# Altium PCB Main Board.PcbDoc
Units mm, origin at the board's own origin, x right, y up, seen from the top; angles counter-clockwise.
Board outline 173 x 13.45 mm, 4 copper layers (Top, Signal Layer 1, Signal Layer 2, Bottom), stack 0.689 mm thick; 121 components, 68 nets, 357 pads, 131 vias.
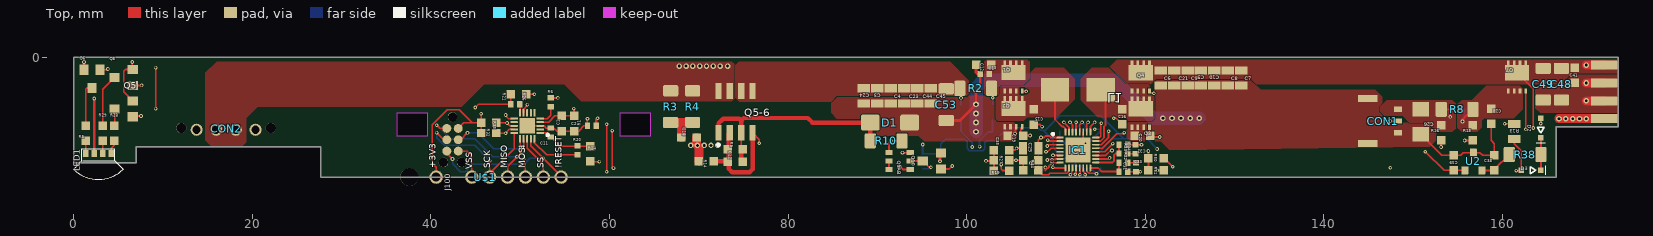
[diagram p0: Top view]
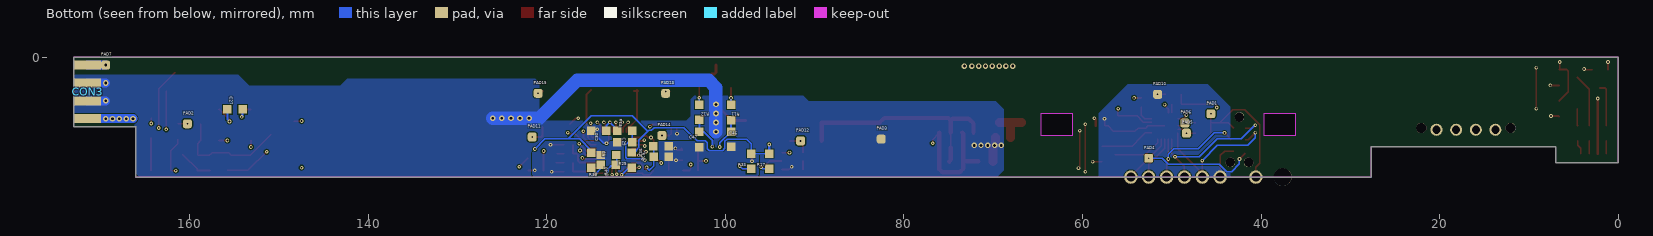
[diagram p1: Bottom view, seen from below]
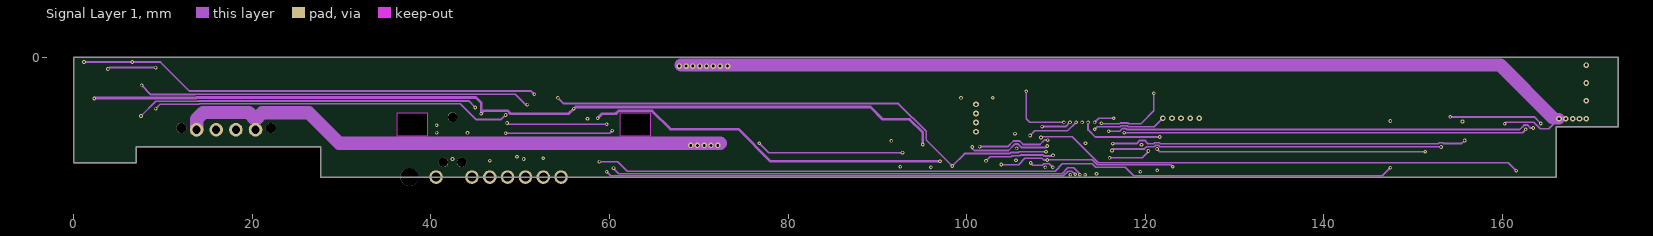
[diagram p2: Signal Layer 1]
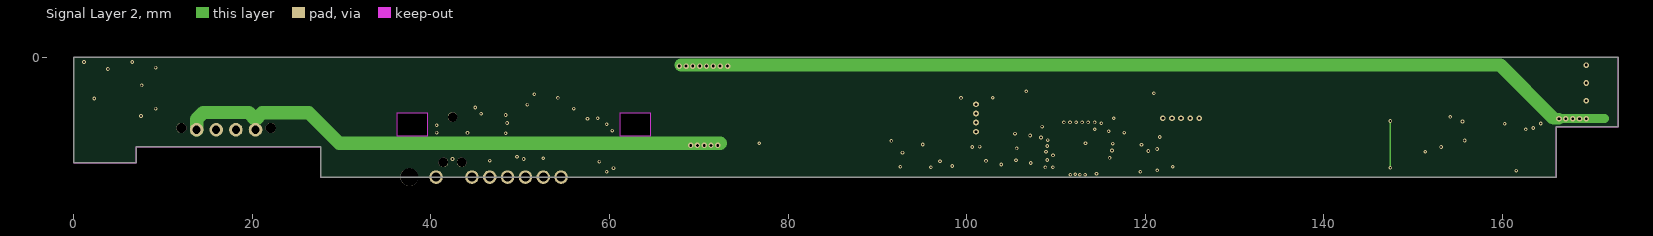
[diagram p3: Signal Layer 2]

## Layer stack, top to bottom
Top Solder: solder mask 0.0102, Solder Resist, Dk 3.5
Top: signal copper 0.018
Dielectric 1: core 0.2, FR-4, Dk 4.8
Signal Layer 1: signal copper 0.036
Dielectric 3: prepreg 0.127, Dk 4.2
Signal Layer 2: signal copper 0.036
Dielectric 2: core 0.254, Dk 4.2
Bottom: signal copper 0.018
Bottom Solder: solder mask 0.0102, Solder Resist, Dk 3.5

## Board outline
0,-11.85 0,0 173,0 173,-7.8 166.05,-7.8 166.05,-13.45 27.685,-13.45 27.685,-10.05 7,-10.05 7,-11.85
cut-out: 61.15,-6.298 61.15,-8.798 64.65,-8.798 64.65,-6.298
cut-out: 36.15,-6.298 36.15,-8.798 39.65,-8.798 39.65,-6.298

## Design rules (kind name [scope] priority, off if disabled: settings)
Clearance Clearance_1 [OnLayer('Keep-Out Layer')] p1: gap=0.15 ignorepadtopadclearanceinfootprint=FALSE except(0: Arc-Hole Track-Hole SMDPad-Hole THPad-Hole Via-Hole Fill-Hole Poly-Hole Region-Hole Text-Hole; 0.05: Track-Track Track-SMDPad Track-THPad Track-Via Track-Fill Track-Poly Track-Region Track-Text SMDPad-SMDPad SMDPad-THPad SMDPad-Via SMDPad-Fill SMDPad-Poly SMDPad-Region SMDPad-Text Via-Via Via-Fill Via-Poly Via-Region Via-Text)
Clearance [All] p2: gap=0.127 ignorepadtopadclearanceinfootprint=FALSE except(0: Arc-Hole Track-Hole SMDPad-Hole THPad-Hole Via-Hole Fill-Hole Poly-Hole Region-Hole Text-Hole)
ComponentClearance [All] p1 off: gap=0.254 collisioncheckmode=3 verticalgap=0.254 showdistances=FALSE
HoleSize [All] p1: absolutevalues=TRUE maxlimit=2540 minlimit=0.2 maxpercent=80.000 minpercent=20.000
HoleToHoleClearance mdDrill [All] p1: gap=0.35 allowstackedmicrovias=TRUE
PasteMaskExpansion Expansion_SMDPaste_OFF [InPadClass('SMDPaste_OFF')] p1: expansion=0
PasteMaskExpansion mlMinCreamFrame [All] p2: expansion=0
PolygonConnect PolygonConnect_For_PolygonThermal_ON_Width78700_Gap78740 [InPolygonClass('PolygonThermal_ON_Width78700_Gap78740')] p1: connectstyle=Direct reliefconductorwidth=0.2 reliefentries=4 polygonreliefangle="90 Angle" airgapwidth=0.2
PolygonConnect PolygonConnect_For_PolygonThermal_ON_Width137800_Gap78740 [InPolygonClass('PolygonThermal_ON_Width137800_Gap78740')] p2: connectstyle=Direct reliefconductorwidth=0.35 reliefentries=4 polygonreliefangle="90 Angle" airgapwidth=0.2
PolygonConnect PolygonConnect_For_PolygonThermal_ON_Width60000_Gap78740 [InPolygonClass('PolygonThermal_ON_Width60000_Gap78740')] p3: connectstyle=Direct reliefconductorwidth=0.152 reliefentries=4 polygonreliefangle="90 Angle" airgapwidth=0.2
PolygonConnect PolygonConnect_For_PolygonThermal_ON_Width196900_Gap78740 [InPolygonClass('PolygonThermal_ON_Width196900_Gap78740')] p4: connectstyle=Direct reliefconductorwidth=0.5 reliefentries=4 polygonreliefangle="90 Angle" airgapwidth=0.2
PolygonConnect PolygonConnect_For_PolygonThermal_OFF [InPolygonClass('PolygonThermal_OFF')] p5: connectstyle=Direct reliefconductorwidth=0.254 reliefentries=4 polygonreliefangle="90 Angle" airgapwidth=0.254
PolygonConnect ThermalVias [IsVia] p6: connectstyle=Direct reliefconductorwidth=0.254 reliefentries=4 polygonreliefangle="90 Angle" airgapwidth=0.2
PolygonConnect [All] p7: connectstyle=Direct reliefconductorwidth=0.254 reliefentries=4 polygonreliefangle="90 Angle" airgapwidth=0.254
RoutingVias [All] p1: holewidth=0.203 width=0.406 viastyle="Through Hole" minholewidth=0.203 minwidth=0.406 maxholewidth=2.54 maxwidth=2.54
SolderMaskExpansion mlMinStopFrame [All] p1: expansion=0
Width [All] p1: maxlimit=254 minlimit=0.15 preferedwidth=0.15
26 further rules are at their usual default settings.

## Classes and differential pairs
pad class SMDPaste_OFF: U1-21

## Components (designator, comment, footprint, x,y, rotation, side; value= is the part's Value field where it differs from the comment)
C1 "0.1µF" 0603 54.659,-7.454 r270 top
C2 "1µF" 0603 56.034,-7.454 r270 top
C3 "10µF" 0805 90,-4.35 r270 top
C4 "10µF" 0805 91.5,-4.35 r270 top
C5 "10µF" 0805 126.25,-2.35 r270 top
C6 "10µF" 0805 121.75,-2.35 r270 top
C7 "10µF" 0805 130.75,-2.35 r270 top
C8 "10µF" 0805 129.25,-2.35 r270 top
C9 "10µF" 0805 124.75,-2.35 r270 top
C10 "10µF" 0805 127.75,-2.35 r270 top
C11 "1800pF" 0402 53.409,-8.454 r90 top
C12 "0.01µF" 0603 101.913,-0.892 r180 top
C15 "0.047µF" 0603 107.513,-6.718 r270 top
C16 "0.047µF" 0603 117.445,-6.683 r270 top
C17 "1000pF" 0402 102.04,-1.908 r180 top
C18 "1µF" 0603 68.91,-9.015 r0 top
C19 "150pF" 0603 105.481,-8.844 r180 top
C20 "150pF" 0603 119.705,-8.816 r180 top
C21 "10µF" 0805 123.25,-2.35 r270 top
C22 "0.1µF" 0603 74.078,-11.707 r0 top
C23 "10µF" 0805 93,-4.35 r270 top
C24 "10µF" 0805 88.5,-4.35 r270 top
C25 "0.47µF" 0805 107.189,-10.231 r180 top
C26 "10µF" C1206 150.869,-7.245 r270 top
C27 "0.1µF" 0603 154.933,-5.868 r180 bottom
C28 "1µF" 0603 158.743,-6.65 r270 top
C29 "1µF" 0603 111.284,-9.528 r0 bottom
C30 "2.2µF" 0603 114.182,-8.268 r0 bottom
C31 "33pF" 0402 117.57,-12.852 r0 top
C32 "680pF" 0402 118.915,-10.32 r90 top
C33 "1800pF" 0402 118.967,-12.352 r270 top
C34 "15pF" 0402 117.57,-9.82 r0 top
C35 "100pF" 0603 103.918,-10.417 r0 top
C36 "100pF" 0603 107.209,-10.01 r180 bottom
C37 "100pF" 0603 107.171,-11.56 r180 top
C38 "0.1µF" 0603 159.124,-11.853 r90 top
C39 "0.1µF" 0603 154.552,-11.853 r90 top
C41 "0.01µF" 0603 168.148,-2.032 r270 top
C44 "10µF" 0805 94.5,-4.35 r270 top
C45 "10µF" 0805 96,-4.35 r270 top
C46 "0.033µF" 0603 99.373,-9.203 r270 bottom
C47 "0.033µF" 0603 102.917,-9.234 r90 bottom
C48 "33µF" 1206 166.624,-3.045 r270 top
C49 "33µF" 1206 164.592,-3.045 r270 top
C53 "33µF" 1206 97.722,-5.333 r270 top
CON1 "BM03B-ADHKS-GAN-ETB" BM03B-ADHKS-GAN-ETB 148.329,-7.168 r0 top
CON2 "HTP-CON-M411" HTP-CON-M411 17.05,-8.148 r90 top
CON3 "AVX-9159-4-PIN-CARD-EDGE" AVX-9159-4-PIN-EDGE 171.543,-3.905 r270 bottom
D1 "SMAJ26CA" DO-214AC 91.414,-7.341 r0 top
D2 "DIODE-SOD323-R" SOD323-R 164.331,-7.961 r90 top
D3 "DIODE-SOD323-R" SOD323-R 163.231,-12.703 r180 top
IC1 "BQ25713B" S-PWQFN-N32 112.466,-10.417 r0 top
J100 "TC2030 Programmer" TC2030 42.418,-7.995 r270 top
L1 "SRP7030-2R2MIND_BOURNS_SRP7030-M" IND_BOURNS_SRP7030-M 112.466,-3.686 r0 top
LED1 "LRTB GVTG" CL-426F-AA-SD-TS 2.761,-10.82 r0 top
PAD1 "3V3" PAD 45.625,-6.353 r90 bottom
PAD2 "VIN" PAD 160.267,-7.479 r90 bottom
PAD3 "VSS" PAD 82.55,-9.192 r90 bottom
PAD4 "UPDI" PAD 52.578,-11.34 r90 bottom
PAD5 "SCL" PAD 48.36,-8.533 r90 bottom
PAD6 "SDA" PAD 48.529,-7.39 r90 bottom
PAD7 "VSYS" PAD 169.425,-0.905 r90 bottom
PAD10 "GNDI" PAD 51.585,-4.181 r90 bottom
PAD11 "LO2_G" PAD 121.646,-8.954 r90 bottom
PAD12 "IN_G" PAD 91.577,-9.394 r90 bottom
PAD13 "HI_G" PAD 106.688,-4.064 r90 bottom
PAD14 "LO_G" PAD 107.112,-8.786 r90 bottom
PAD15 "HI2_G" PAD 120.975,-4.064 r90 bottom
Q1 "CSD17551Q3A" TI-Q3A 105.25,-2.25 r90 top
Q2 "CSD17551Q3A" TI-Q3A 105.25,-6.25 r90 top
Q3 "CSD17551Q3A" TI-Q3A 119.507,-6.301 r90 top
Q4 "CSD17551Q3A" TI-Q3A 119.507,-2.263 r90 top
Q5 "2N7002" SOT-23 5.588,-5.801 r90 top
Q5-6 "IRF9358TRPBF" INFENION_SO8 74.117,-6.148 r0 top
Q6 "2N7002" SOT-23 2.032,-2.438 r180 top
Q7 "CSD25402Q3A" TI-Q3A 161.664,-2.263 r90 top
Q8 "2N7002" SOT-23 5.588,-2.286 r90 top
Q9AB "DCX124EK-7-F" SC-74R 92.497,-11.658 r270 top
Q10 "2N7002" SOT-23 96.109,-11.658 r90 top
R1 "0R" 0402 58.034,-7.704 r0 top
R2 "0.01Ω" 1206 101.025,-3.5 r0 top
R3 "RES 3.9 OHM 5% 1/4W 1206" 1206 66.853,-5.56 r90 top
R4 "RES 3.9 OHM 5% 1/4W 1206" 1206 69.317,-5.56 r90 top
R5 "RC0603FR-07232RL" 0603 1.336,-8.533 r90 top
R6 "10.0k" 0402 53.409,-5.079 r270 top
R7 "300k" 0603 113.09,-10.975 r180 bottom
R8 "0.01Ω" 1206 154.936,-5.868 r0 top
R9 "100k" 0603 74.078,-10.31 r0 top
R10 "10.0Ω" 1206 90.989,-9.394 r0 top
R11 "4.99Ω" 0603 99.373,-6.216 r270 bottom
R12 "4.99Ω" 0603 102.923,-6.186 r270 bottom
R13 "1.0Ω" 0805 161.339,-8.342 r90 top
R14 "20k" 0603 70.854,-11.682 r180 top
R15 "10.0Ω" 0603 156.714,-8.496 r90 top
R16 "10.0Ω" 0603 153.158,-8.496 r90 top
R17 "10k" 0603 95.093,-11.658 r90 bottom
R18 "10.0Ω" 0603 111.284,-8.258 r180 bottom
R19 "383k" 0603 103.917,-12.725 r0 top
R20 "10.0k" 0402 56.409,-10.454 r270 top
R21 "10.0k" 0402 49.456,-5.285 r0 top
R22 "40.2k" 0402 117.57,-11.836 r180 top
R23 "10.0k" 0402 117.57,-10.82 r0 top
R24 "10.0Ω" 0603 57.83,-10.842 r270 top
R25 "10.0k" 0603 110.511,-11.546 r90 bottom
R26 "100k" 0603 49.805,-4.181 r180 top
R27 "127k" 0603 103.918,-11.56 r180 top
R28 "RC0603FR-0760R4L" 0603 4.536,-8.533 r90 top
R29 "RC0603FR-0760R4L" 0603 3.236,-8.548 r90 top
R30 "137k" 0603 107.171,-11.179 r0 bottom
R32 "10.0k" 0603 46.475,-8.512 r180 top
R33 "10.0k" 0603 97.125,-11.658 r90 bottom
R34 "30.1k" 0603 107.171,-12.703 r0 top
R35 "10.0k" 0603 46.475,-7.369 r180 top
R38 "10.0Ω" 1206 162.556,-10.925 r180 top
R39 "10.0k" 0603 115.032,-11.567 r270 bottom
R40 "2.0M" 0603 113.115,-12.093 r0 bottom
R50 "120k" 0603 121.211,-11.328 r0 top
R51 "100k" 0603 121.211,-12.703 r180 top
U1 "ATTINY816-MFR" QFN40P300X300X90-21N 50.784,-7.704 r180 top
U2 "LM3480IM3-3.3TR-ND" SOT-23_2 156.777,-11.703 r0 top
U$1 "ATTINY_DEBUG" ATTINY_DEBUG 48.585,-13.45 r0 top

## Footprints (in the part's own frame and the unit in brackets; to place one, negate y for a bottom-side part, rotate by r counter-clockwise, add the part's x,y. Pads: shape width x height; smd on the part's side, far side on the other; paste and mask are expansions set on the pad)
0402 [mm] "0402"
  rect 0.6x0.7 smd: P$1(-0.5,0) P$2(0.5,0)
  body extent -0.55,-0.27 0.55,0.28, height 0.35
0603 [mm] "0603"
  rect 0.95x0.95 smd: P$1(-0.85,0) P$2(0.85,0)
  body extent -0.87,-0.48 0.87,0.47, height 0.55
0805 [mm] "0805"
  rect 0.9x1.4 smd: P$1(-0.85,0) P$2(0.85,0)
  body extent -1.01,-0.64 1.01,0.64, height 1.25
1206 [mm] "1206"
  rrect25% 1.25x1.7 smd: P$1(-1.775,0) P$2(1.775,0)
  body extent -1.7,-0.9 1.7,0.9, height 1.8
ATTINY_DEBUG [mm] "ATTINY_DEBUG"
  round 2 hole 2 unplated: MH1(-11,0)
  round 1.5 / inner round 1.524 / far side round 1.5 hole 1: P$1(-4,0) P$2(-8,0) P$3(-2,0) P$4(0,0) P$5(2,0) P$6(4,0) P$7(6,0)
AVX-9159-4-PIN-EDGE [mm] "AVX-9159-4-PIN-EDGE"
  rect 1x3 smd far side: P$1(3,0.1) P$2(1,0.1) P$3(-1,0.1) P$4(-3,0.1)
  rect 1x3 smd: P$1(3,0.1) P$2(1,0.1) P$3(-1,0.1) P$4(-3,0.1)
BM03B-ADHKS-GAN-ETB [mm] "BM03B-ADHKS-GAN-ETB"
  rect 0.9x0.6 smd: P$1(0,1.3) P$2(0,0) P$3(0,-1.3)
  rect 2.2x0.75 smd: P$4(-3.4,-2.525) P$5(-3.4,2.525)
C1206 [mm] "C1206"
  rect 1.6x1.8 smd: 1(-1.4,0) 2(1.4,0)
CL-426F-AA-SD-TS [mm]
  rect 0.6x0.8 smd mask+0.051: 1(-1.425,0) 2(-0.475,0) 4(1.425,0) 5(0.475,0)
  silkscreen extent -2.78,-2.9 2.78,0.53
DO-214AC [mm] "DO-214AC"
  rrect25% 2.1x1.8 smd: P$1(-2.2,0) P$2(2.2,0)
HTP-CON-M411 [mm] "HTP-CON-M411"
  round 1.15 hole 1.15 unplated: MH1(0.2,-5) MH2(0.2,5)
  round 1.35 / inner round 1.524 / far side round 1.35 hole 0.9: P$1(0,-3.3) P$2(0,-1.1) P$3(0,1.1) P$4(0,3.3)
IND_BOURNS_SRP7030-M [mil] "IND_BOURNS_SRP7030-M"
  rect 125x103 smd: 1(-101,0) 2(101,0)
  body extent -154,-138 154,138, height 118
INFENION_SO8 [mm] "INFENION_SO8"
  rect 0.72x1.78 smd: P$1(-1.905,-2.34) P$2(-0.635,-2.34) P$3(0.635,-2.34) P$4(1.905,-2.34) P$5(1.905,2.34) P$6(0.635,2.34) P$7(-0.635,2.34) P$8(-1.905,2.34)
  silkscreen extent -2.03,-3.81 -1.78,-3.56
PAD [mm] "PAD"
  rrect50% 1x1 smd paste+0: P$1(0,0)
QFN40P300X300X90-21N [mm] "QFN40P300X300X90-21N"
  rrect25% 0.81x0.22 smd: 1(-1.455,0.8) 2(-1.455,0.4) 3(-1.455,0) 4(-1.455,-0.4) 5(-1.455,-0.8) 11(1.455,-0.8) 12(1.455,-0.4) 13(1.455,0) 14(1.455,0.4) 15(1.455,0.8)
  rrect25% 0.22x0.81 smd: 6(-0.8,-1.455) 7(-0.4,-1.455) 8(0,-1.455) 9(0.4,-1.455) 10(0.8,-1.455) 16(0.8,1.455) 17(0.4,1.455) 18(0,1.455) 19(-0.4,1.455) 20(-0.8,1.455)
  rect 1.7x1.7 smd paste+0: 21(0,0)
  silkscreen extent -2.41,0.89 -2.16,1.14
S-PWQFN-N32 [mm] "S-PWQFN-N32"
  rrect100% 0.8x0.2 smd: P$1(-2,1.4) P$2(-2,1) P$3(-2,0.6) P$4(-2,0.2) P$5(-2,-0.2) P$6(-2,-0.6) P$7(-2,-1) P$8(-2,-1.4) P$17(2,-1.4) P$18(2,-1) P$19(2,-0.6) P$20(2,-0.2) P$21(2,0.2) P$22(2,0.6) P$23(2,1) P$24(2,1.4)
  rrect100% 0.2x0.8 smd: P$9(-1.4,-2) P$10(-1,-2) P$11(-0.6,-2) P$12(-0.2,-2) P$13(0.2,-2) P$14(0.6,-2) P$15(1,-2) P$16(1.4,-2) P$25(1.4,2) P$26(1,2) P$27(0.6,2) P$28(0.2,2) P$29(-0.2,2) P$30(-0.6,2) P$31(-1,2) P$32(-1.4,2)
  rect 2.8x2.8 smd: P$33(0,0)
  silkscreen extent -2.92,1.65 -2.67,1.9
SC-74R [mil] "SC-74R"
  rect 21.65x31.5 smd: B1(0,-47.24) B2(0,47.24) C1(-37.4,47.24) C2(37.4,-47.24) E1(-37.4,-47.24) E2(37.4,47.24)
SOD323-R [mm] "SOD323-R"
  rect 0.6x0.6 smd: A(1.1,0) C(-1.1,0)
  silkscreen extent -1.65,-0.51 0.1,0.51
SOT-23 [mil] "SOT-23"
  rect 40x45 smd: 1(-35,-40) 2(35,-40) 3(0,40)
SOT-23_2 [mm]
  rrect25% 0.8x0.9 smd: P$1(-0.95,-1) P$2(0.95,-1) P$3(0,1)
TC2030 [mm] "Programer Cable Connection"
  round 1.067 hole 1.067 unplated paste+0 mask+0.051: 0(-1.27,0) 0(3.81,-1.016) 0(3.81,1.016)
  round 1 smd paste-5 mask+0.051: 1(0,-0.635) 2(0,0.635) 3(1.27,-0.635) 4(1.27,0.635) 5(2.54,-0.635) 6(2.54,0.635)
TI-Q3A [mm] "TI-Q3A"
  rect 0.6x0.3 smd: P$1(-1.55,0.975) P$2(-1.55,0.325) P$3(-1.55,-0.325) P$4(-1.55,-0.975)
  rect 0.635x0.3 smd: P$5(1.55,-0.975) P$6(1.55,-0.325) P$7(1.55,0.325) P$8(1.55,0.975)
  rect 1.7x2.7 smd: P$9(0.5,0)

## Part data
C1 C2 C12 C15 C16 C18 C19 C20 C22 C27 C28 C29 C30 C35 C36 C37 C38 C39 C41 C46 C47: library part SMD_CAP0603
C3 C4 C5 C6 C7 C8 C9 C10 C21 C23 C24 C25 C44 C45: library part SMD_CAP0805
C11 C17 C31 C32 C33 C34: library part SMD_CAP0402
C26: library part C-EUC1206, "CAPACITOR, European symbol"
C48 C49 C53: library part SMD_CAP1206
D2 D3: "DIODE"
LED1: library part CL-426F-AA-SD-TS, "TRICOLOR SIDE FIRING 2.8 X 0.85"
PAD1 PAD2 PAD3 PAD4 PAD5 PAD6 PAD7 PAD10 PAD11 PAD12 PAD13 PAD14 PAD15: library part 1X1_PAD
Q5 Q6 Q8 Q10: library part SMD-MOSFET-N-CH-60V-300MA-LOGIC-LEVEL-FET-2N7002(SOT-23), "305030028"
R1 R6 R20 R21 R22 R23: library part SMD_RES0402
R2 R8 R10 R38: library part SMD_RES1206
R3 R4: library part RMCF1206JT3R90, "3.9 Ohms ±5% 0.25W, 1/4W Chip Resistor 1206 (3216 Metric) Automotive AEC-Q200 Thick Film"
R5: "RES SMD 232 OHM 1% 1/10W 0603"
R7 R9 R11 R12 R14 R15 R16 R17 R18 R19 R24 R25 R26 R27 R30 R32 R33 R34 R35 R39 R40 R50 R51: library part SMD_RES0603
R13: library part SMD_RES0805
R28 R29: "RES SMD 60.4 OHM 1% 1/10W 0603"
U1: "Mcu, 8bit, Pic24fj, 20mhz, Qfn-20"

## Via types
v1: diameter 0.406, hole 0.203, Top to Bottom, 101 vias
v2: diameter 0.635, hole 0.305, Top to Bottom, 17 vias
v3: diameter 0.61, hole 0.305, Top to Bottom, 13 vias

## Nets (pads, with @x,y where several pads share a name; then routed paths per layer and width w, separated by ;. In a path a pad name is that pad's centre, name@x,y a point inside that pad or via, vN(x,y) a via of type N, cw(c..) or ccw(c..) an arc to the next point about the centre after c; other vN are vias at no path point)
+3V3: C1.P$1 C2.P$1 C39.P$1 J100.2 LED1.2 PAD1.P$1 R17.P$2 R25.P$2 R32.P$2 R33.P$2 R35.P$2 R39.P$1 U1.4 U2.P$1 U$1.P$2 | length 200.9
  Top w0.15: v1(151.384,-10.616) 151.395,-10.616 153.481,-12.703
  Top w0.152: U$1.P$2@40.585,-13.324 40.585,-12.338 40.132,-11.885 40.132,-7.58 41.816,-5.896 43.18,-5.896 44.653,-7.369 ; J100.2 43.68,-7.369 44.653,-7.369 ; R32.P$2 R35.P$2 ; v1(45.625,-6.353) R35.P$2 ; U1.4 53.188,-7.304 53.888,-6.604 C1.P$1 C2.P$1 56.034,-5.815 v1(56,-5.781) ; 153.481,-12.703 C39.P$1 U2.P$1 ; 44.653,-7.369 R35.P$2
  Top w0.3: LED1.2 v1(2.286,-4.643)
  Signal Layer 1 w0.15: v1(121.343,-10.31) 121.65,-10.616 v1(151.384,-10.616)
  Signal Layer 1 w0.3: v1(2.286,-4.643) 2.34,-4.589 13.73,-4.589 13.781,-4.539 45.053,-4.539 45.625,-5.112 v1(45.625,-6.353) 45.97,-6.008 48.559,-6.008 48.904,-6.353 55.429,-6.353 v1(56,-5.781) 56.187,-5.594 89.214,-5.594 90.608,-6.988 93.602,-6.988 95.093,-8.479 v1(95.093,-9.793)
  Bottom w0.15: R17.P$2 R33.P$2 97.125,-9.709 97.616,-9.218 99.812,-9.218 100.05,-9.457 100.05,-10.232 100.301,-10.482 101.839,-10.482 102.041,-10.28 102.041,-9.598 102.232,-9.406 ; 117.602,-9.177 120.21,-9.177 v1(121.343,-10.31)
  Bottom w0.152: 102.232,-9.406 103.177,-9.406 104.665,-7.918 108.054,-7.918 108.054,-7.961 108.292,-8.199 108.55,-8.199 108.681,-8.331 ; R25.P$2@110.815,-10.71 110.235,-10.71 109.68,-10.155 109.68,-9.329 108.681,-8.331 ; R39.P$1@115.032,-10.474 116.329,-9.177 117.602,-9.177 115.006,-6.581 110.431,-6.581 108.681,-8.331
  Bottom w0.3: R17.P$2 v1(95.093,-9.793)
ACN: C47.P$2 IC1.P$2 R12.P$2 | length 13.6
  Top w0.2: v1(109.086,-9.31) 109.193,-9.417 IC1.P$2
  Signal Layer 1 w0.2: v1(101.459,-10.032) 104.632,-10.032 105.257,-9.406 105.941,-9.406 106.331,-9.795 108.222,-9.795 108.708,-9.31 v1(109.086,-9.31)
  Bottom w0.2: v1(101.459,-10.032) 101.459,-9.343 102.418,-8.385 C47.P$2 102.917,-7.042 R12.P$2
ACP: C46.P$1 IC1.P$3 R11.P$2 | length 14.2
  Top w0.2: v1(109.037,-9.972) 109.193,-9.817 IC1.P$3
  Signal Layer 1 w0.2: v1(100.641,-10.077) 100.641,-10.259 100.849,-10.467 104.691,-10.467 105.402,-9.756 105.796,-9.756 106.186,-10.145 108.864,-10.145 v1(109.037,-9.972)
  Bottom w0.2: R11.P$2 C46.P$1 100.641,-9.62 v1(100.641,-10.077)
BATDRV: IC1.P$21 Q7.P$4 | length 53.3
  Top w0.2: IC1.P$21 115.192,-10.217 116.821,-8.588 117.537,-8.588 v1(117.657,-8.468) ; v1(162.639,-8.104) Q7.P$4
  Signal Layer 1 w0.15: v1(117.657,-8.468) 162.275,-8.468
  Signal Layer 1 w0.2: 162.275,-8.468 v1(162.639,-8.104)
BTST1: C15.P$2 IC1.P$30 | length 5.6
  Top w0.2: C15.P$2 108.236,-7.568 v1(108.46,-7.793) ; v1(111.577,-7.318) 111.866,-7.607 IC1.P$30
  Signal Layer 1 w0.2: v1(108.46,-7.793) 111.102,-7.793 v1(111.577,-7.318)
BTST2: C16.P$2 IC1.P$25 | length 4.9
  Top w0.2: IC1.P$25 113.866,-7.792 v1(114.341,-7.318) ; v1(116.48,-6.861) 116.773,-6.861 C16.P$2
  Signal Layer 1 w0.2: v1(114.341,-7.318) 114.798,-6.861 v1(116.48,-6.861)
CELL_BATPRESZ: IC1.P$18 R50.P$1 R51.P$2 | length 8.5
  Top w0.2: IC1.P$18 115.901,-11.417 v1(116.022,-11.295) ; R51.P$2 R50.P$1 v1(120.361,-10.528)
  Signal Layer 1 w0.2: v1(116.022,-11.295) 119.664,-11.295 120.361,-10.598 v1(120.361,-10.528)
CHG_INDICATOR: Q5.1 R21.P$1 R26.P$2 | length 44.6
  Top w0.15: 48.213,-5.285 R21.P$1 R26.P$2
  Top w0.2: Q5.1 6.69,-6.604 v1(7.528,-6.604) ; v1(44.958,-5.652) 45.325,-5.285 48.213,-5.285
  Signal Layer 1 w0.2: v1(7.528,-6.604) 9.165,-4.966 13.886,-4.966 13.937,-4.916 44.222,-4.916 v1(44.958,-5.652)
CHG_OK: IC1.P$4 Q10.1 R6.P$1 R33.P$1 | length 64.4
  Top w0.2: R6.P$1 53.414,-4.575 v1(54.222,-4.575) ; Q10.1 98.048,-12.547 v1(98.385,-12.211) ; v1(108.889,-10.62) 109.061,-10.62 109.465,-10.217 IC1.P$4
  Signal Layer 1 w0.2: v1(54.222,-4.575) 54.865,-5.217 92.364,-5.217 95.47,-8.323 95.47,-9.296 v1(98.385,-12.211) 99.779,-10.817 104.836,-10.817 104.947,-10.706 105.796,-10.706 105.881,-10.62 v1(108.889,-10.62)
  Bottom w0.2: R33.P$1 98.087,-12.508 v1(98.385,-12.211)
CMPIN: IC1.P$14 R7.P$2 R40.P$1 | length 4.1
  Top w0.15: IC1.P$14 113.066,-12.817 113.355,-13.106 113.281,-13.18 v1(113.281,-13.197)
  Bottom w0.2: R7.P$2@112.187,-10.975 112.175,-10.987 112.175,-12.22 112.858,-12.22 113.15,-12.512 113.15,-12.798 113.203,-12.851 113.181,-12.873 113.279,-12.97 113.254,-12.996 113.355,-13.097 113.281,-13.171 v1(113.281,-13.197)
CMPOUT: IC1.P$15 R39.P$2 R40.P$2 | length 3.6
  Top w0.15: IC1.P$15 113.466,-12.757 113.533,-12.757 113.541,-12.766 113.541,-12.851 113.732,-13.042 114.52,-13.042 v1(114.545,-13.067)
  Bottom w0.2: R40.P$2@113.875,-12.22 113.875,-12.396 v1(114.545,-13.067) 115.032,-12.58 R39.P$2
COMP1: C31.P$1 IC1.P$16 R22.P$2 | length 4.4
  Top w0.2: IC1.P$16 114.72,-12.417 115.133,-12.83 C31.P$1@117.07,-12.83 ; C31.P$1 C31.P$1@117.07,-12.83 ; R22.P$2 C31.P$1@117.07,-12.83
COMP2: C34.P$1 IC1.P$17 R23.P$1 | length 4.4
  Top w0.2: IC1.P$17 116.337,-11.817 116.52,-11.633 116.52,-10.984 116.684,-10.82 R23.P$1 C34.P$1
DGND: C25.P$2 C29.P$2 C31.P$2 C32.P$2 C33.P$2 C34.P$2 C35.P$2 C36.P$2 C37.P$2 C46.P$2 C47.P$1 Q10.2 R1.P$2 R7.P$1 R27.P$1 R30.P$1 R34.P$1 R51.P$1 | length 51.2
  Top w0.15: R34.P$1 C37.P$2
  Top w0.2: R27.P$1 v1(105.532,-11.56) C37.P$2 ; C35.P$2@104.954,-10.231 C35.P$2 105.413,-10.417 v1(105.599,-10.231) C25.P$2 ; C31.P$2 C33.P$2 v1(119.469,-12.852) ; C34.P$2 v1(119.596,-9.82) ; v1(121.366,-12.703) R51.P$1
  Top w0.3: R1.P$2 58.534,-6.993 v1(58.667,-6.861) ; v1(97.028,-11.684) 97.028,-10.867 Q10.2
  Signal Layer 1 w0.2: v1@105.481,-11.56 105.507,-11.534 v1(105.532,-11.56)
  Signal Layer 1 w0.3: v1(58.667,-6.861) 59.175,-6.353 60.704,-6.353 61.035,-6.021 64.765,-6.021 66.825,-8.082 74.459,-8.082 78.061,-11.684 v1(97.028,-11.684)
GNDI: C1.P$2 C2.P$2 C11.P$2 J100.6 PAD10.P$1 Q5.2 Q6.2 Q8.2 R1.P$1 R26.P$1 U1.3 U1.21 U$1.P$1 | length 71.5
  Top w0.15: R26.P$1 v1(51.585,-4.181) ; U1.21 U1.3 52.689,-7.704 52.939,-7.954 C11.P$2 53.782,-7.954 54.132,-8.304 C1.P$2 C2.P$2 56.539,-8.304 57.139,-7.704 R1.P$1 v1(57.534,-6.905)
  Top w0.152: J100.6 44.093,-10.535 44.585,-11.027 U$1.P$1@44.585,-13.324
  Top w0.2: Q6.2 v1(1.143,-0.559) ; v1(6.543,-0.559) 6.543,-1.336 Q8.2 5.766,-1.397 5.588,-1.575 5.588,-3.896 Q5.2
  Signal Layer 1 w0.2: v1(1.143,-0.559) v1(6.543,-0.559) 9.703,-0.559 12.957,-3.813 51.216,-3.813 v1(51.585,-4.181)
HIDRV1: IC1.P$31 PAD13.P$1 Q1.P$4 | length 9.2
  Top w0.2: Q1.P$4@106.225,-3.847 v1(106.688,-3.847) ; v1(110.895,-7.318) 111.466,-7.889 IC1.P$31
  Signal Layer 1 w0.2: v1(106.688,-3.847) 106.688,-6.924 107.082,-7.318 v1(110.895,-7.318)
HIDRV2: IC1.P$24 PAD15.P$1 Q4.P$4 | length 11.3
  Top w0.2: IC1.P$24 114.907,-9.016 115.037,-8.886 115.037,-7.41 v1(115.097,-7.41) ; Q4.P$4 120.734,-4.064 v1(120.975,-4.064)
  Signal Layer 1 w0.2: v1(115.097,-7.41) 115.157,-7.47 117.128,-7.47 117.21,-7.389 118.103,-7.389 118.185,-7.47 119.533,-7.47 120.975,-6.028 v1(120.975,-4.064)
IADPT: C36.P$1 IC1.P$8 R30.P$2 | length 5.6
  Top w0.2: v1(108.826,-12.366) 108.81,-12.382 108.81,-12.703 109.242,-12.27 109.242,-12.169 109.569,-11.841 110.441,-11.841 IC1.P$8
  Bottom w0.2: C36.P$1@108.039,-10.231 108.039,-12.211 108.531,-12.703 108.826,-12.407 v1(108.826,-12.366)
IBAT: C37.P$1 IC1.P$9 | length 5.2
  Top w0.2: v1@107.183,-11.862 107.486,-11.56 C37.P$1 ; v1(109.672,-12.347) 109.672,-12.385 109.704,-12.417 IC1.P$9
  Signal Layer 1 w0.15: v1(107.183,-11.864) 107.439,-12.12 108.499,-12.12 108.659,-11.961 109.286,-11.961 v1(109.672,-12.347)
ILIM_HIZ: C35.P$1 IC1.P$6 R19.P$1 R27.P$2 | length 11.9
  Top w0.2: v1(102.179,-11.633) 102.995,-11.633 R27.P$2 ; R19.P$1 103.068,-12.724 R27.P$2 ; C35.P$1 R27.P$2 ; v1(109.68,-11.016) IC1.P$6
  Signal Layer 1 w0.2: v1(102.179,-11.633) 102.645,-11.167 104.981,-11.167 105.092,-11.056 105.941,-11.056 106.026,-10.97 108.567,-10.97 108.692,-11.095 109.601,-11.095 v1(109.68,-11.016)
L1_INPUT: C15.P$1 IC1.P$32 L1.1 Q1.P$1 Q1.P$2 Q1.P$3 Q2.P$5 Q2.P$6 Q2.P$7 Q2.P$8 Q2.P$9 | length 5.8
  Top w0.2: L1.1@109.775,-3.817 L1.1@110.238,-3.817 ; L1.1 109.901,-6.995 110.698,-7.793 110.85,-7.793 111.066,-8.009 IC1.P$32
L1_OUTPUT: C16.P$1 IC1.P$23 L1.2 Q3.P$5 Q3.P$6 Q3.P$7 Q3.P$8 Q3.P$9 Q4.P$1 Q4.P$2 Q4.P$3 | length 6.7
  Top w0.2: IC1.P$23 115.002,-9.417 115.387,-9.031 115.387,-7.792 115.572,-7.607 115.572,-4.226 L1.2
LODRV1: C19.P$1 IC1.P$29 PAD14.P$1 Q2.P$4 | length 8.7
  Top w0.2: Q2.P$4@106.075,-7.918 106.075,-8.588 C19.P$1 106.389,-8.786 v1(107.112,-8.786) ; IC1.P$29 v1(112.266,-7.304)
  Signal Layer 1 w0.2: v1(107.112,-8.786) 107.63,-8.268 111.303,-8.268 v1(112.266,-7.304)
LODRV2: C20.P$1 IC1.P$26 PAD11.P$1 Q3.P$4 | length 12.7
  Top w0.2: IC1.P$26 113.466,-7.461 v1(113.609,-7.318) ; Q3.P$4 120.482,-8.743 C20.P$1 120.467,-8.904 120.518,-8.954 v1(121.646,-8.954)
  Signal Layer 1 w0.2: v1(113.609,-7.318) 113.609,-8.159 114.404,-8.954 v1(121.646,-8.954)
MISO: J100.1 U1.16 U$1.P$4 | length 16.5
  Top w0.15: v1(40.64,-7.646) 40.989,-7.995 J100.1 ; U$1.P$4@48.585,-13.325 48.585,-12.233 v1(49.642,-11.176) 49.984,-10.834 U1.16
  Bottom w0.15: v1(40.64,-7.646) 40.693,-7.646 42.214,-9.168 44.933,-9.168 46.941,-11.176 v1(49.642,-11.176)
MOSI: J100.4 U1.17 U$1.P$5 | length 13.2
  Top w0.15: J100.4@43.327,-9.265 v1(44.093,-8.499) ; U1.17 v1(50.384,-11.43) 50.384,-11.681 50.585,-11.882 U$1.P$5@50.585,-13.325
  Bottom w0.15: v1(44.093,-8.499) 45.241,-8.499 47.038,-10.297 49.805,-10.297 50.384,-10.876 v1(50.384,-11.43)
NetC3_P$1: C3.P$1 C4.P$1 C23.P$1 C24.P$1 C44.P$1 C45.P$1 C53.P$1 Q5-6.P$5 Q5-6.P$6 R2.P$1 R11.P$1 | length 1.9
  Top w0.2: v1(99.373,-4.582) 99.373,-3.435 R2.P$1@99.376,-3.432
  Bottom w0.2: R11.P$1 v1(99.373,-4.582)
NetC11_P$1: C11.P$1 R20.P$1 R24.P$1 U1.1 | length 6.2
  Top w0.15: U1.1 52.959,-8.504 C11.P$1 54.447,-9.992 R24.P$1
NetC12_P$1: C12.P$1 C17.P$1 Q1.P$5 Q1.P$6 Q1.P$7 Q1.P$8 Q1.P$9 R2.P$2 R12.P$1 | length 1.9
  Top w0.2: v1(102.923,-4.552) 102.923,-3.405 R2.P$2@102.926,-3.402
  Bottom w0.2: R12.P$1 v1(102.923,-4.552)
NetC18_P$1: C18.P$1 R3.P$1 R4.P$1 | length 4.1
  Top w1: R3.P$1 68.072,-7.335 ; C18.P$1 68.06,-7.347 68.072,-7.335 ; R4.P$1 68.072,-7.335
NetC22_P$1: C22.P$1 Q5-6.P$2 Q5-6.P$4 Q9AB.C1 R9.P$1 R14.P$1 | length 31.5
  Top w0.15: Q5-6.P$4 76.784,-9.25 v1(76.784,-9.666) ; v1(92.825,-10.709) Q9AB.C1
  Top w0.5: R14.P$1 73.203,-11.682 C22.P$1 ; Q5-6.P$2 73.381,-8.59 73.381,-12.533 73.749,-12.901 75.692,-12.901 76.022,-12.571 Q5-6.P$4
  Signal Layer 1 w0.15: v1(76.784,-9.666) 77.827,-10.709 v1(92.825,-10.709)
NetC22_P$2: C22.P$2 D1.P$1 Q5-6.P$1 Q5-6.P$3 R9.P$2 R10.P$1 | length 27.5
  Top w0.2: 74.395,-6.858 74.444,-6.907 74.712,-7.175 ; Q5-6.P$3 74.752,-10.134 R9.P$2 C22.P$2
  Top w0.5: Q5-6.P$1 72.212,-7.436 72.741,-6.907 74.444,-6.907 74.524,-6.907 74.752,-7.135 ; R9.P$2@74.752,-10.134 74.752,-11.531 C22.P$2 ; Q5-6.P$3 74.752,-7.135 ; R10.P$1@89.214,-9.394 D1.P$1 82.735,-7.341 82.224,-6.83 75.057,-6.83 74.752,-7.135
NetC32_P$1: C32.P$1 R23.P$2 | length 0.8
  Top w0.15: R23.P$2 C32.P$1
NetC33_P$1: C33.P$1 R22.P$1 | length 0.9
  Top w0.2: R22.P$1 118.952,-11.836 C33.P$1
NetC38_P$1: C38.P$1 R38.P$2 U2.P$2 | length 3.9
  Top w0.2: U2.P$2 C38.P$1 159.124,-12.582 R38.P$2
NetD2_C: D2.C D3.C R38.P$1 | length 3.6
  Top w0.2: D3.C R38.P$1 D2.C
NetIC1_P$19: IC1.P$19 R16.P$1 | length 40
  Top w0.2: IC1.P$19 115.581,-11.016 116.125,-10.473 v1(116.289,-10.473) ; v1(153.155,-10.084) 153.155,-9.349 R16.P$1
  Signal Layer 1 w0.15: 120.164,-10.053 121.027,-10.053 121.175,-9.905 121.511,-9.905 121.659,-10.053 153.124,-10.053 v1(153.155,-10.084)
  Signal Layer 1 w0.2: v1(116.289,-10.473) 116.467,-10.295 119.922,-10.295 120.164,-10.053
NetIC1_P$20: IC1.P$20 R15.P$1 | length 43.2
  Top w0.2: IC1.P$20 115.464,-10.616 v1(116.378,-9.702) ; v1(155.783,-9.349) 155.786,-9.346 R15.P$1
  Signal Layer 1 w0.15: 120.313,-9.703 120.985,-9.703 121.06,-9.628 121.625,-9.628 121.701,-9.703 152.865,-9.703
  Signal Layer 1 w0.2: v1(116.378,-9.702) 119.042,-9.702 119.399,-9.345 119.955,-9.345 120.313,-9.703 ; 152.865,-9.703 152.959,-9.609 153.352,-9.609 153.446,-9.703 155.43,-9.703 v1(155.783,-9.349)
NetLED1_1: LED1.1 R5.P$1 | length 1.4
  Top w0.2: LED1.1 R5.P$1
NetLED1_4: LED1.4 R28.P$1 | length 1.6
  Top w0.2: LED1.4 4.186,-10.216 4.536,-9.866 R28.P$1
NetLED1_5: LED1.5 R29.P$1 | length 1.4
  Top w0.2: LED1.5 R29.P$1
NetPAD12_P$1: PAD12.P$1 Q9AB.E1 R10.P$2 | length 2.6
  Top w0.2: Q9AB.E1 91.297,-9.675 v1(91.577,-9.394) R10.P$2
NetQ5_3: Q5.3 R28.P$2 | length 1.9
  Top w0.2: R28.P$2 4.572,-7.647 Q5.3
NetQ6_1: Q6.1 U1.11 | length 52.5
  Top w0.2: Q6.1 3.724,-1.422 v1(3.81,-1.336) ; v1(9.165,-5.781) v1(9.165,-1.182) ; v1(48.36,-6.488) 48.36,-6.579 48.685,-6.904 U1.11
  Signal Layer 1 w0.2: v1(3.81,-1.336) 3.964,-1.182 v1(9.165,-1.182) ; v1(9.165,-5.781) 9.653,-5.293 14.022,-5.293 14.072,-5.243 43.286,-5.243 45.036,-6.993 47.855,-6.993 v1(48.36,-6.488)
NetQ6_3: Q6.3 R5.P$2 | length 4.8
  Top w0.2: R5.P$2 1.336,-3.622 1.504,-3.454 Q6.3
NetQ8_1: Q8.1 U1.9 | length 46.2
  Top w0.2: Q8.1 v1(7.595,-3.175) ; U1.9 50.384,-5.829 50.8,-5.414 v1(50.8,-5.334)
  Signal Layer 1 w0.2: v1(7.595,-3.175) 8.633,-4.212 13.574,-4.212 13.625,-4.162 49.462,-4.162 50.634,-5.334 v1(50.8,-5.334)
NetQ8_3: Q8.3 R29.P$2 | length 6
  Top w0.2: R29.P$2 3.236,-3.622 Q8.3
NetQ9AB_B1: Q9AB.B1 Q9AB.C2 | length 0.9
  Top w0.2: Q9AB.C2 Q9AB.B1
NetQ9AB_B2: Q9AB.B2 Q10.3 R17.P$1 | length 3.6
  Top w0.2: Q9AB.B2 Q10.3 95.788,-12.353 v1(96,-12.353)
  Bottom w0.2: R17.P$1 95.845,-12.508 v1(96,-12.353)
NetR6_P$2: R6.P$2 U1.5 | length 2.3
  Top w0.15: U1.5 53.034,-6.904 53.409,-6.528 R6.P$2
NetR20_P$2: R20.P$2 U1.20 | length 5.8
  Top w0.15: U1.20 51.585,-9.592 52.947,-10.954 R20.P$2
NetR21_P$2: R21.P$2 U1.10 | length 1
  Top w0.15: R21.P$2 49.984,-5.314 U1.10
NTC: CON1.P$2 R24.P$2 | length 97.5
  Top w0.15: R24.P$2 57.85,-11.712 v1(58.871,-11.712) ; v1(147.469,-7.168) CON1.P$2
  Signal Layer 1 w0.15: v1(58.871,-11.712) 60.91,-11.712 61.969,-12.771 109.923,-12.771 110.73,-11.964 114.087,-11.964 114.495,-12.371 117.766,-12.371 118.721,-13.325 146.54,-13.325 v1(147.469,-12.396)
  Signal Layer 2 w0.15: v1(147.469,-12.396) v1(147.469,-7.168)
P\R\O\C\H\O\T\: IC1.P$11 R25.P$1 | length 2.1
  Top w0.15: v1(111.628,-13.185) 111.681,-13.185 111.693,-13.197 111.756,-13.133 111.756,-12.967 111.791,-12.932 111.791,-12.811 111.866,-12.736 IC1.P$11
  Bottom w0.2: R25.P$1@110.815,-12.409 111.603,-13.197 111.614,-13.185 v1(111.628,-13.185)
PGND: C3.P$2 C4.P$2 C5.P$2 C6.P$2 C7.P$2 C8.P$2 C9.P$2 C10.P$2 C12.P$2 C17.P$2 C18.P$2 C19.P$2 C20.P$2 C21.P$2 C23.P$2 C24.P$2 C26.2 C28.P$2 C30.P$2 C38.P$2 C39.P$2 C41.P$2 C44.P$2 C45.P$2 C48.P$2 C49.P$2 C53.P$2 CON1.P$3 CON1.P$4 CON1.P$5 CON2.P$1 CON2.P$4 CON3.P$2 CON3.P$3 D1.P$2 IC1.P$27 IC1.P$33 PAD3.P$1 Q2.P$1 Q2.P$2 Q2.P$3 Q3.P$1 Q3.P$2 Q3.P$3 Q9AB.E2 R14.P$2 U2.P$3 | length 206.9
  Top w0.15: C18.P$2 69.76,-10.027 70.005,-10.271 R14.P$2 ; v1(105.425,-8.581) Q2.P$3@105.425,-7.918 ; IC1.P$27 113.066,-9.394 v1(113.327,-9.655) ; C26.2 153.227,-11.003 C39.P$2 155.344,-11.003 155.645,-10.703 U2.P$3 157.505,-10.703 157.806,-11.003 C38.P$2 159.124,-9.693 158.743,-9.312 C28.P$2
  Top w0.2: v1(92.587,-12.299) 92.896,-12.608 Q9AB.E2
  Top w0.3: C53.P$2 99.264,-7.108 v2(101.063,-5.309) 101.063,-3.799 101.54,-3.322 C17.P$2 101.235,-1.908 101.063,-1.736 C12.P$2
  Top w1: C18.P$2 69.76,-9.816 v3(69.85,-9.906) 70.005,-10.061 R14.P$2 ; v2(169.425,-4.905) CON3.P$2@171.443,-4.905 ; v2(169.425,-2.905) CON3.P$3@171.443,-2.905
  Signal Layer 1 w0.15: v1(114.36,-8.082) 114.625,-7.816 117.21,-7.816 117.335,-7.691 117.978,-7.691 118.103,-7.816 121.035,-7.816 v2(121.991,-6.861)
  Signal Layer 1 w1.5: CON2.P$4 13.75,-6.947 14.477,-6.22 19.575,-6.22 20.35,-6.995 21.107,-6.238 26.295,-6.238 29.732,-9.675 72.39,-9.675
  Signal Layer 2 w1.5: CON2.P$4 13.75,-6.947 14.477,-6.22 19.575,-6.22 20.35,-6.995 21.107,-6.238 26.295,-6.238 29.732,-9.675 72.39,-9.675
  Bottom w0.15: v1(113.327,-9.655) 113.645,-9.655 C30.P$2 114.846,-8.082 v1(114.36,-8.082) v1@114.268,-8.082
  Bottom w1: v2(169.425,-4.905) CON3.P$2@171.443,-4.905 ; v2(169.425,-2.905) CON3.P$3@171.443,-2.905
  Bottom w1.5: v2(101.063,-8.357) v2(101.063,-7.341) v2(101.063,-6.325) v2(101.063,-5.309) 101.063,-3.422 101.87,-2.615 116.607,-2.615 120.853,-6.861 v2(121.991,-6.861) v2(123.007,-6.861) v2(124.023,-6.861) v2(125.039,-6.861) v2(126.055,-6.861)
  other v3: 69.088,-9.906 70.612,-9.906 71.374,-9.906 72.136,-9.906
PSYS: IC1.P$10 R34.P$2 | length 4.2
  Top w0.15: R34.P$2 108.496,-13.178 109.19,-13.178 109.326,-13.042 111.201,-13.042 111.223,-13.02 111.223,-13.017 111.46,-12.78 111.463,-12.78 111.466,-12.776 IC1.P$10
R\E\S\E\T\: J100.5 PAD4.P$1 U1.19 U$1.P$7 | length 18.2
  Top w0.15: J100.5@41.783,-10.795 v1(42.418,-11.43) ; U1.19 51.184,-9.946 53.34,-12.102 54.563,-13.325 U$1.P$7@54.585,-13.325
  Bottom w0.15: v1(42.418,-11.43) 42.418,-11.979 43.264,-12.825 43.859,-12.825 44.678,-12.005 50.382,-12.005 51.048,-11.34 v1(52.578,-11.34)
REGN: C30.P$1 IC1.P$28 R18.P$1 | length 3.6
  Top w0.2: IC1.P$28 112.666,-7.592 v1(112.94,-7.318)
  Bottom w0.2: R18.P$1 112.134,-8.124 v1(112.94,-7.318) 112.94,-7.32 113.332,-7.712 C30.P$1
S\S\: U1.18 U$1.P$6 | length 4.9
  Top w0.15: U1.18 50.784,-10.231 52.585,-12.032 U$1.P$6@52.585,-13.325
SCK: J100.3 U1.15 U$1.P$3 | length 16.6
  Top w0.15: v1(40.64,-8.468) 41.437,-9.265 J100.3 ; U$1.P$3 U$1.P$3@46.585,-13.041 ; v1(46.585,-11.6) U$1.P$3@46.585,-13.041 ; U1.15 49.33,-10.297 U$1.P$3@46.585,-13.041
  Bottom w0.15: v1(40.64,-8.468) 40.64,-9.052 41.494,-9.906 44.891,-9.906 v1(46.585,-11.6)
SCL: IC1.P$13 PAD5.P$1 R32.P$1 U1.14 | length 72.5
  Top w0.15: R32.P$1 47.347,-8.533 v1(48.36,-8.533) 48.79,-8.104 U1.14 ; v1(60.318,-8.239) 60.318,-12.322 v1(60.445,-12.449) ; IC1.P$13 112.666,-12.729 112.741,-12.804 112.741,-13.131 112.746,-13.136 v1(112.695,-13.185) v1(112.695,-13.185)
  Signal Layer 1 w0.15: v1(48.36,-8.533) 60.024,-8.533 v1(60.318,-8.239) ; v1(60.445,-12.449) 61.045,-13.048 110.698,-13.048 111.33,-12.417 112.017,-12.417 112.695,-13.095 v1(112.695,-13.185)
SDA: IC1.P$12 PAD6.P$1 R35.P$1 U1.13 | length 72.5
  Top w0.15: R35.P$1 47.347,-7.39 v1(48.529,-7.39) 48.843,-7.704 U1.13 ; v1(59.683,-12.852) v1(59.683,-7.533) ; v1(112.162,-13.134) 112.162,-13.058 112.266,-12.953 IC1.P$12
  Signal Layer 1 w0.15: v1(48.529,-7.39) 48.671,-7.533 v1(59.683,-7.533) ; v1(59.683,-12.852) 60.156,-13.325 110.821,-13.325 111.366,-12.78 111.796,-12.78 112.15,-13.134 v1(112.162,-13.134)
SRP: C27.P$1 C28.P$1 Q7.P$1 Q7.P$2 Q7.P$3 R8.P$2 R15.P$2 | length 3.3
  Top w0.2: v1(155.543,-7.216) 155.543,-7.037 R8.P$2
  Bottom w0.2: v1(155.543,-7.216) 155.783,-6.976 C27.P$1
VBAT: C26.1 C27.P$2 CON1.P$1 D2.A R8.P$1 R16.P$2 | length 13.7
  Top w0.2: R8.P$1 153.992,-5.868 154.171,-6.048 v1(154.171,-6.708) ; v1(164.306,-7.445) 164.306,-6.886 D2.A
  Signal Layer 1 w0.2: v1(154.171,-6.708) 163.569,-6.708 v1(164.306,-7.445)
  Bottom w0.2: C27.P$2 154.083,-6.62 v1(154.171,-6.708)
VBUS: C25.P$1 D3.A IC1.P$1 R13.P$1 | length 62.9
  Top w0.15: R13.P$1 161.339,-9.728 162.106,-10.494 162.106,-12.728 v1(161.563,-12.728)
  Top w0.2: C25.P$1 108.039,-9.307 v1(108.329,-9.016) 108.708,-9.016 108.889,-8.835 109.283,-8.835 109.464,-9.016 IC1.P$1
  Signal Layer 1 w0.15: v1(108.329,-9.016) 108.441,-8.905 111.812,-8.905 114.724,-11.817 160.651,-11.817 v1(161.563,-12.728)
VDDA: C29.P$1 IC1.P$7 R18.P$2 R19.P$2 R50.P$2 | length 30.1
  Top w0.15: R50.P$2 122.115,-11.328 v1(123.084,-12.296)
  Top w0.2: v1(103.881,-12.042) 103.881,-12.542 104.065,-12.725 R19.P$2 ; v1(109.037,-11.534) 109.08,-11.491 109.877,-11.491 109.952,-11.417 IC1.P$7
  Signal Layer 1 w0.15: v1(103.881,-12.042) 105.836,-12.042 106.536,-11.342 ; v1(109.037,-11.534) 114.05,-11.534 114.609,-12.094 122.881,-12.094 v1(123.084,-12.296)
  Signal Layer 1 w0.2: 106.536,-11.342 108.443,-11.342 108.636,-11.534 v1(109.037,-11.534)
  Bottom w0.15: v1(109.037,-11.534) 109.114,-11.61 109.302,-11.422 109.848,-11.422 109.895,-11.375 111.067,-11.375 111.187,-11.255 111.187,-9.849 110.866,-9.528 C29.P$1 R18.P$2
VIN: CON2.P$2 CON2.P$3 CON3.P$1 PAD2.P$1 Q5-6.P$7 Q5-6.P$8 R3.P$2 R4.P$2 R13.P$2 | length 224.8
  Top w0.15: v1(160.267,-7.479) 160.28,-7.492 R13.P$2
  Top w1: v2(166.363,-6.905) v2(167.125,-6.905) v2(167.887,-6.905) v2(168.649,-6.905) v2(169.425,-6.905) CON3.P$1@171.443,-6.905
  Signal Layer 1 w0.15: v1(160.267,-7.479) 160.42,-7.327 163.544,-7.327 164.259,-8.042 165.226,-8.042 v2(166.363,-6.905)
  Signal Layer 1 w1.27: 165.601,-6.734 165.773,-6.905 v2(166.363,-6.905)
  Signal Layer 1 w1.5: v3@68.06,-0.9 159.768,-0.9 165.601,-6.734
  Signal Layer 2 w1: v2(166.363,-6.905) v2(167.125,-6.905) v2(167.887,-6.905) v2(168.649,-6.905) v2(169.425,-6.905) 171.443,-6.905
  Signal Layer 2 w1.27: 165.601,-6.734 165.773,-6.905 v2(166.363,-6.905)
  Signal Layer 2 w1.5: v3@68.06,-0.9 159.768,-0.9 165.601,-6.734
  Bottom w1: v2(166.363,-6.905) v2(167.125,-6.905) v2(167.887,-6.905) v2(168.649,-6.905) v2(169.425,-6.905) CON3.P$1@171.443,-6.905
  other v3: 67.818,-1.016 68.58,-1.016 69.342,-1.016 70.104,-1.016 70.866,-1.016 71.628,-1.016 72.39,-1.016 73.228,-1.016
VSYS: C5.P$1 C6.P$1 C7.P$1 C8.P$1 C9.P$1 C10.P$1 C21.P$1 C41.P$1 C48.P$1 C49.P$1 CON3.P$4 IC1.P$22 PAD7.P$1 Q4.P$5 Q4.P$6 Q4.P$7 Q4.P$8 Q4.P$9 Q7.P$5 Q7.P$6 Q7.P$7 Q7.P$8 Q7.P$9 | length 61.5
  Top w0.2: IC1.P$22 115.097,-9.817 115.907,-9.007 v1(115.907,-8.308) ; Q7.P$9 163.468,-3.566 v1(163.468,-7.948)
  Top w1: v2(169.425,-0.905) CON3.P$4@171.443,-0.905
  Signal Layer 1 w0.2: v1(115.907,-8.308) 117.145,-8.308 117.46,-7.993 117.853,-7.993 117.978,-8.118 161.953,-8.118 162.443,-7.629 162.836,-7.629 163.114,-7.907 163.114,-7.935 163.127,-7.948 v1(163.468,-7.948)
  Bottom w1: v2(169.425,-0.905) CON3.P$4@171.443,-0.905
pads on no net: CON2.MH1 CON2.MH2 IC1.P$5 J100.0 U1.2 U1.6 U1.7 U1.8 U1.12 U$1.MH1

## Polygon pours and split planes (outlines as drawn)
VIN on Top "VIN_L01_P067" (solid, remove dead copper, pour order 67): 103.117,-4.448
NetC3_P$1 on Top "NETC3_P$1_L01_P071" (solid, remove dead copper, pour order 71): 74.101,-0.926 74.479,-0.548 98.165,-0.548 100.25,-2.633 100.25,-4.115 100.007,-4.358 96.895,-4.358 85.465,-4.358 84.83,-4.993 74.553,-4.993 74.101,-4.54
NetC12_P$1 on Top "NETC12_P$1_L01_P073" (solid, remove dead copper, pour order 73): 102.244,-0.294 102,-0.538 102,-1.793 102,-4.134 102.224,-4.358 103.379,-4.358 103.582,-4.155 103.587,-3.38 103.88,-3.088 106.42,-3.088 107.055,-2.453 107.055,-0.548 106.801,-0.294
L1_INPUT on Top "L1_INPUT_L01_P075" (solid, remove dead copper, pour order 75): 103.88,-3.088 103.245,-3.723 103.245,-6.898 103.499,-7.152 106.42,-7.152 106.801,-6.771 110.103,-6.771 112.135,-4.739 112.135,-2.453 110.865,-1.183 107.69,-1.183 107.055,-1.818 107.055,-2.453 106.42,-3.088
L1_OUTPUT on Top "L1_OUTPUT_L01_P077" (solid, remove dead copper, pour order 77): 112.77,-2.453 114.04,-1.183 115.945,-1.183 117.839,-3.077 120.379,-3.077 121.025,-3.723 121.025,-6.898 120.777,-7.146 118.098,-7.146 117.723,-6.771 114.7,-6.771 112.77,-4.84
VSYS on Top "VSYS_L01_P079" (solid, remove dead copper, pour order 79): 138.666,-0.511
VSYS on Top "VSYS_L01_P081" (solid, remove dead copper, pour order 81): 137.534,-0.257
VSYS on Top "VSYS_L01_P083" (solid, remove dead copper, pour order 83): 136.899,-1.146
VSYS on Top "VSYS_L01_P085" (solid, remove dead copper, pour order 85): 115.945,-1.183 116.834,-0.294 173,-0.294 173,-1.834 167.784,-1.834 166.541,-3.077 132.463,-3.077 131.828,-2.453 121.266,-2.453 120.641,-3.077 117.839,-3.077
PGND on Top "PGND_L01_P089" (solid, remove dead copper, pour order 89): 106.36,-4.483
PGND on Top "PGND_L01_P091" (solid, remove dead copper, pour order 91): 85.465,-4.358 84.83,-4.993 84.83,-6.263 85.465,-6.898 88.005,-6.898 88.64,-7.533 88.64,-8.168 89.275,-8.803 94.609,-8.803 95.26,-9.454 105.15,-9.454 105.629,-8.975 105.629,-7.684 105.277,-7.332 105.277,-7.314 105.115,-7.152 103.499,-7.152 103.245,-6.898 103.245,-4.866 102.737,-4.358
SRP on Top "SRP_L01_P095" (solid, remove dead copper, pour order 95): 158.373,-3.04 161.768,-3.04 162.299,-3.571 162.299,-5.832 161.283,-6.848 158.002,-6.848 157.727,-7.123 157.727,-7.877 157.219,-8.385 155.441,-8.385 154.933,-7.877 154.933,-5.337 155.441,-4.829 156.584,-4.829
VBAT on Top "VBAT_L01_P097" (solid, remove dead copper, pour order 97): 147.059,-4.829 146.297,-5.591 146.297,-6.099 146.803,-6.604 148.858,-6.604 149.606,-7.352 151.631,-7.352 151.631,-7.369 152.647,-8.385 154.425,-8.385 154.933,-7.877 154.933,-5.337 154.425,-4.829
PGND on Top "PGND_L01_P099" (solid, remove dead copper, pour order 99): 172.838,-1.797 167.875,-1.797 166.632,-3.04 164.342,-3.04 163.569,-3.813 163.569,-5.591 164.234,-6.255 172.838,-6.255
VIN on Top "VIN_L01_P101" (solid, remove dead copper, pour order 101): 73.685,-0.511 74.101,-0.926 74.101,-4.54 73.685,-4.956 56.84,-4.956 54.935,-3.051 45.956,-3.051 43.427,-5.579 20.579,-5.579 19.297,-6.861 19.297,-9.542 18.789,-10.05 15.429,-10.05 14.725,-9.346 14.725,-1.763 14.743,-1.763 15.995,-0.511
PGND on Top "PGND_L01_P109" (solid, remove dead copper, pour order 109): 131.68,-2.416 132.876,-3.612 145.796,-3.683 146.545,-4.432 146.55,-6.848 147.066,-7.352 151.638,-7.352 152.609,-8.382 152.647,-9.265 151.863,-10.05 122.729,-10.441 121.721,-9.417 118.324,-9.417 117.927,-9.02 117.927,-7.519 118.338,-7.108 120.854,-7.108 121.102,-6.848 121.102,-2.656 121.343,-2.416
DGND on Bottom "DGND_L04_P103" (solid, remove dead copper, pour order 103): 96.259,-13.211 96.259,-9.68 96.513,-9.426 121.376,-9.426 121.643,-9.693 121.643,-13.212 121.405,-13.45 96.513,-13.45
PGND on Bottom "PGND_L04_P105" (solid, remove dead copper, pour order 105): 69.584,-13.45 68.834,-12.7 68.834,-5.842 69.72,-4.956 90.671,-4.956 91.306,-4.321 103.48,-4.321 103.87,-4.71 103.87,-6.622 104.362,-7.115 120.361,-7.115 120.853,-6.622 120.853,-2.866 121.303,-2.416 142.371,-2.416 143.158,-3.202 153.329,-3.202 154.572,-1.959 173,-1.959 173,-6.255 167.595,-6.255 166.05,-7.8 166.05,-13.008 165.611,-13.447
GNDI on Bottom "GNDI_L04_P107" (solid, remove dead copper, pour order 107): 43.427,-5.579 45.956,-3.051 54.935,-3.051 58.159,-6.275 58.159,-13.45 43.427,-13.45

## Keep-outs
Keep-Out Layer:
  lines w0: 166.05,-13.45 27.685,-13.45 27.685,-10.05 7,-10.05 7,-11.85 0,-11.85 0,0 173,0 173,-7.8 166.05,-7.8 ; 166.05,-13.45 166.05,-7.8 ; 166.05,-13.45 166.05,-7.8

## Silkscreen, mask and mechanical layers (free items; w line width, h text height)
Dimension:
  lines w0: 61.15,-8.544 61.15,-6.044 ; 36.15,-8.798 39.65,-8.798 39.65,-6.298 36.15,-6.298 36.15,-8.798 ; 61.15,-8.798 64.65,-8.798 64.65,-6.298 61.15,-6.298 61.15,-8.798
Assembly Bottom:
  rectangle: 27.68,-13.45 35.68,0
  rectangle: 79.68,-13.45 87.68,0
  rectangle: 131.68,-13.45 139.68,0
  lines w0.127: 35.68,0 173,0

## Text inside footprints (layer, text, board x,y; h text height)
U$1: Top Overlay "VSS" at 44.902,-12.561 h1.24 r90; Top Overlay "+3V3" at 40.838,-12.434 h1.24 r90; Top Overlay "SCK" at 46.934,-12.434 h1.24 r90; Top Overlay "MISO" at 48.839,-12.434 h1.24 r90; Top Overlay "MOSI" at 50.871,-12.434 h1.24 r90; Top Overlay "SS" at 52.903,-12.434 h1.24 r90; Top Overlay "!RESET" at 54.935,-12.434 h1.24 r90